# Altium PCB Smart Watch PCB Layout.PcbDoc
Units mm, origin at the board's own origin, x right, y up, seen from the top; angles counter-clockwise.
Board outline 30 x 25 mm, 4 copper layers (Top Layer, Signal Layer 1, Signal Layer 2, Bottom Layer), stack 0.778 mm thick; 25 components, 18 nets, 154 pads, 0 vias.
Unrouted connection lines stored in the file: 75.
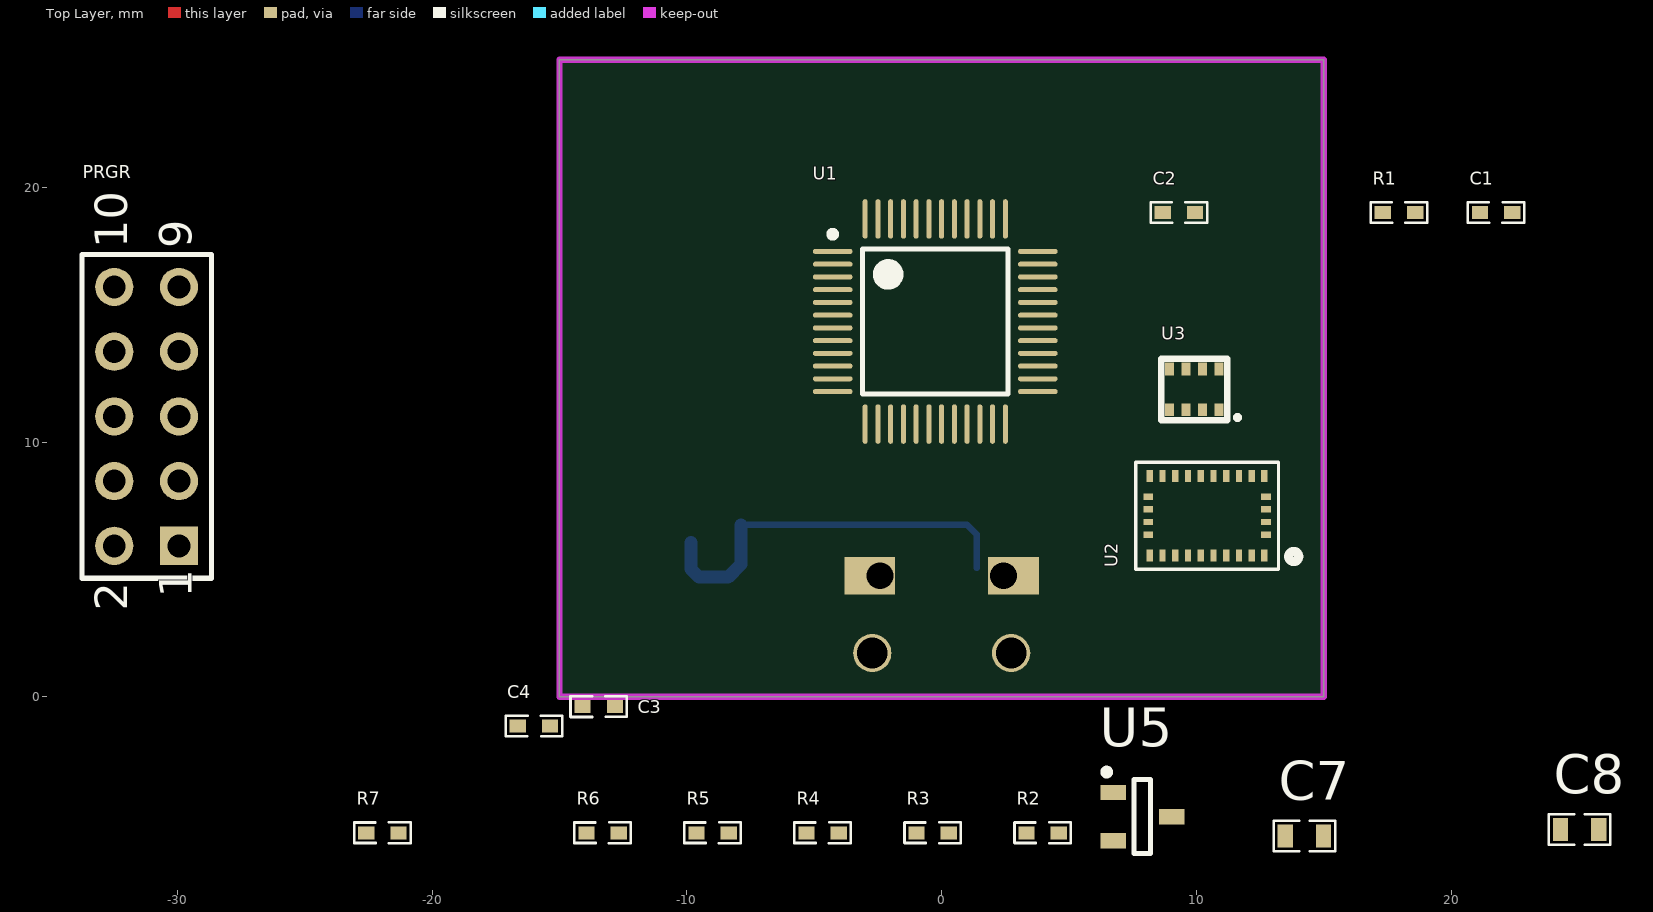
[diagram p0: Top Layer view]
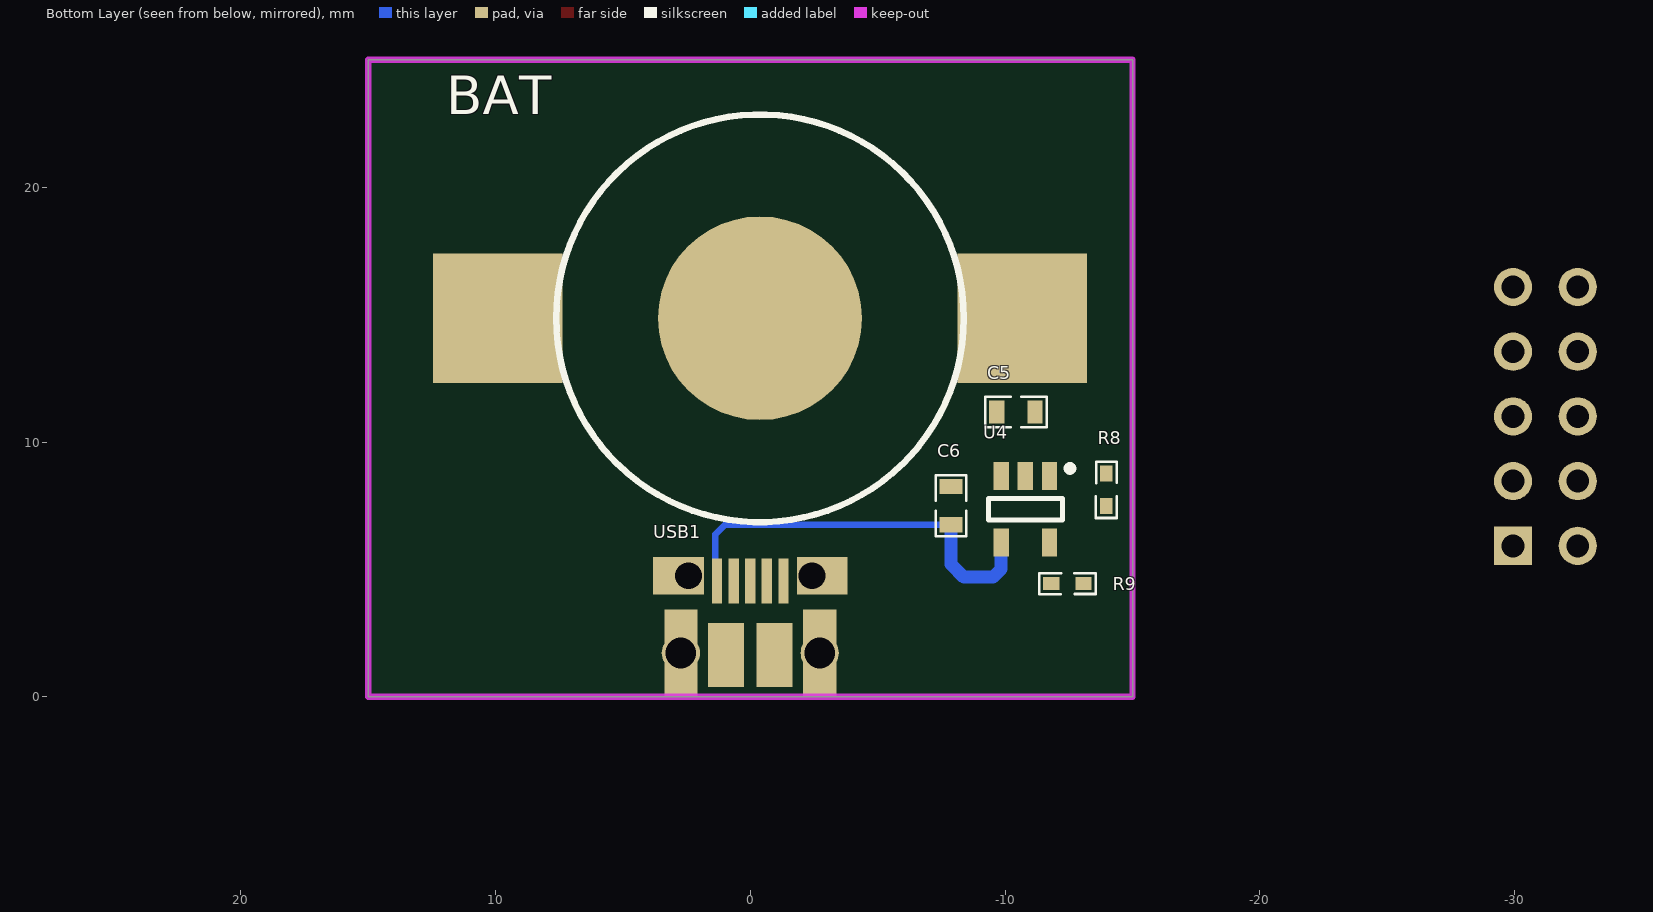
[diagram p1: Bottom Layer view, seen from below]

## Layer stack, top to bottom
Top Solder: solder mask 0.0102, Solder Resist, Dk 3.5
Top Layer: signal copper 0.0356
Dielectric 1: core 0.254, FR-4, Dk 4.2
Signal Layer 1: signal copper 0.036
Dielectric 3: prepreg 0.127, Dk 4.2
Signal Layer 2: signal copper 0.036
Dielectric 2: core 0.254, Dk 4.2
Bottom Layer: signal copper 0.0356
Bottom Solder: solder mask 0.0102, Solder Resist, Dk 3.5

## Board outline
-15,0 -15,25 15,25 15,0

## Design rules (kind name [scope] priority, off if disabled: settings)
Clearance [All] p1: gap=0.254
PolygonConnect [All] p1: connectstyle=Relief reliefconductorwidth=0.254 reliefentries=4 polygonreliefangle="90 Angle" airgapwidth=0.254
RoomDefinition "Smart Watch Schematic" [InComponentClass('Smart Watch Schematic')] p1: confinementstyle=ConfineIn formatcopy=TRUE lockcomponents=FALSE outline -33.998,-12.192 -26.416,-12.192 -26.416,-15.113 -33.998,-15.113
RoutingVias [All] p1: holewidth=0.711 width=1.27 viastyle="Through Hole" minholewidth=0.711 minwidth=1.27 maxholewidth=0.711 maxwidth=1.27
SolderMaskExpansion [All] p1: expansion=0.102
Width [All] p1: maxlimit=0.254 minlimit=0.254 preferedwidth=0.254
30 further rules are at their usual default settings.

## Components (designator, comment, footprint, x,y, rotation, side; value= is the part's Value field where it differs from the comment)
BAT "CR2032 3.7V LiPo" "Keystone 3002 CR2032 Battery Holder" -0.381,14.859 r0 bottom
C1 "0.1uF" _0402 21.12,19.009 r0 top
C2 "0.1uF" _0402 8.674,19.009 r0 top
C3 "0.1uF" _0402 -12.827,-0.381 r180 top
C4 "0.1uF" _0402 -15.367,-1.143 r180 top
C5 "0.1uF" _0603 -11.176,11.176 r0 bottom
C6 "0.1uF" _0603 -7.874,8.255 r270 bottom
C7 "1uF" _0603 13.486,-5.461 r0 top
C8 "1uF" _0603 24.281,-5.207 r0 top
PRGR "SAM SWD" HDR2X5 -29.934,5.928 r90 top
R1 "10K" _0402 17.31,19.009 r0 top
R2 "10K" _0402 3.326,-5.334 r0 top
R3 "10K" _0402 -0.992,-5.334 r0 top
R4 "10K" _0402 -5.31,-5.334 r0 top
R5 "10K" _0402 -9.628,-5.334 r0 top
R6 "10K" _0402 -13.946,-5.334 r0 top
R7 "1K" _0402 -22.582,-5.334 r0 top
R8 "10K" _0402 -13.97,8.763 r270 bottom
R9 "2K" _0402 -13.081,4.445 r0 bottom
U1 "ATSAML21G18B" _QFP48 -0.254,14.732 r0 top
U2 "BNO 055" BNO055 10.414,7.112 r180 top
U3 "BMP280" BMP280 9.906,12.065 r270 top
U4 "MCP73831" SOT23-5 -10.795,7.366 r270 bottom
U5 "APN7333" SOT23-3 7.874,-4.699 r0 top
USB1 "USB Micro B" "USB Micro B Connector" 0,0 r180 bottom

## Footprints (in the part's own frame and the unit in brackets; to place one, negate y for a bottom-side part, rotate by r counter-clockwise, add the part's x,y. Pads: shape width x height; smd on the part's side, far side on the other; paste and mask are expansions set on the pad)
_0402 [mil]
  rect 25x20 smd: 1(0,0) 2(50,0)
  silkscreen extent -18,-16 69,16
_0603 [mm]
  rect 0.6x0.9 smd: 1(0,0) 2(1.5,0)
  silkscreen extent -0.45,-0.6 1.95,0.6
_QFP48 [mm] "Thin QFP, 48-Leads, Body 7x7mm, Pitch 0.5mm, IPC High Density"
  oval 1.55x0.2 smd: 1(-4.025,2.75) 2(-4.025,2.25) 3(-4.025,1.75) 4(-4.025,1.25) 5(-4.025,0.75) 6(-4.025,0.25) 7(-4.025,-0.25) 8(-4.025,-0.75) 9(-4.025,-1.25) 10(-4.025,-1.75) 11(-4.025,-2.25) 12(-4.025,-2.75) 25(4.025,-2.75) 26(4.025,-2.25) 27(4.025,-1.75) 28(4.025,-1.25) 29(4.025,-0.75) 30(4.025,-0.25) 31(4.025,0.25) 32(4.025,0.75) 33(4.025,1.25) 34(4.025,1.75) 35(4.025,2.25) 36(4.025,2.75)
  oval 0.2x1.55 smd: 13(-2.75,-4.025) 14(-2.25,-4.025) 15(-1.75,-4.025) 16(-1.25,-4.025) 17(-0.75,-4.025) 18(-0.25,-4.025) 19(0.25,-4.025) 20(0.75,-4.025) 21(1.25,-4.025) 22(1.75,-4.025) 23(2.25,-4.025) 24(2.75,-4.025) 37(2.75,4.025) 38(2.25,4.025) 39(1.75,4.025) 40(1.25,4.025) 41(0.75,4.025) 42(0.25,4.025) 43(-0.25,4.025) 44(-0.75,4.025) 45(-1.25,4.025) 46(-1.75,4.025) 47(-2.25,4.025) 48(-2.75,4.025)
  silkscreen extent -4.15,-2.85 2.85,3.55, body extent -3.5,-3.5 3.5,3.5, height 1.6
BMP280 [mm]
  rect 0.5x0.35 smd: 1(0.8,0.975) 2(0.8,0.325) 3(0.8,-0.325) 4(0.8,-0.975) 5(-0.8,-0.975) 6(-0.8,-0.325) 7(-0.8,0.325) 8(-0.8,0.975)
  silkscreen extent -1.2,-1.3 1.2,1.75
BNO055 [mm] "BNO055"
  rect 0.25x0.475 smd: 1(-2.25,1.563) 6(-2.25,-1.563) 7(-1.75,-1.563) 8(-1.25,-1.563) 9(-0.75,-1.563) 10(-0.25,-1.563) 11(0.25,-1.563) 12(0.75,-1.563) 13(1.25,-1.563) 14(1.75,-1.563) 15(2.25,-1.563) 20(2.25,1.563) 21(1.75,1.563) 22(1.25,1.563) 23(0.75,1.563) 24(0.25,1.563) 25(-0.25,1.563) 26(-0.75,1.563) 27(-1.25,1.563) 28(-1.75,1.563)
  rect 0.375x0.25 smd: 2(-2.312,0.75) 3(-2.312,0.25) 4(-2.312,-0.25) 5(-2.312,-0.75) 16(2.312,-0.75) 17(2.312,-0.25) 18(2.312,0.25) 19(2.312,0.75)
  silkscreen extent -3.6,-2.1 2.8,2.1
HDR2X5 [mm] "Connector; Header; 5x2 Position"
  rect 1.5x1.5 hole 0.9: 1(0,0)
  round 1.5 hole 0.9: 2(0,2.54) 3(2.54,0) 4(2.54,2.54) 5(5.08,0) 6(5.08,2.54) 7(7.62,0) 8(7.62,2.54) 9(10.16,0) 10(10.16,2.54)
  silkscreen extent -1.27,-1.27 11.43,3.81
"Keystone 3002 CR2032 Battery Holder" [mm]
  rect 5.08x5.08 smd: 1(-10.285,0) 1(10.285,0)
  round 8 smd: 2(0,0)
  silkscreen extent -8,-8 8,8
SOT23-3 [mm]
  rect 1x0.6 smd: 1(-1.15,0.95) 2(-1.15,-0.95) 3(1.15,0)
  silkscreen extent -1.52,-1.45 0.33,1.87
SOT23-5 [mm]
  rect 1.1x0.6 smd: 1(-1.3,0.95) 2(-1.3,0) 3(-1.3,-0.95) 4(1.3,-0.95) 5(1.3,0.95)
  silkscreen extent -1.72,-1.45 0.43,1.87
"USB Micro B Connector" [mm]
  rect 0.4x1.75 smd: D+(0,4.548) D-(-0.65,4.548) GND(1.3,4.548) ID(0.65,4.548) VBUS(-1.3,4.548)
  rect 2x1.46 all layers, no hole: ""(-2.825,4.753) ""(2.825,4.753)
  round 1.5 hole 1.2: ""(-2.725,1.723) ""(2.725,1.723)
  rect 1.3x3.4 smd: ""(-2.725,1.723) ""(2.725,1.723)
  round 1.2 hole 1.05: ""(-2.425,4.753) ""(2.425,4.753)
  rect 1.425x2.5 smd: ""(-0.95,1.647) ""(0.95,1.647)

## Part data
BAT: library part "Keystone 3002 CR2032 Battery Holder"
C1 C2 C3 C4 C5 C6 C7 C8: library part Cap, "Capacitor"
PRGR: library part "Header 5X2", "Header, 5-Pin, Dual row"
R1 R2 R3 R4 R5 R6 R7 R8 R9: library part Res1, "Resistor"
U5: library part "AP7333 3.3V 300mA Regulator"
USB1: library part "USB Micro B Connector"

## Nets (pads, with @x,y where several pads share a name; then routed paths per layer and width w, separated by ;. In a path a pad name is that pad's centre, name@x,y a point inside that pad or via, vN(x,y) a via of type N, cw(c..) or ccw(c..) an arc to the next point about the centre after c; other vN are vias at no path point)
3.3V: C1.2 C3.2 C4.2 C8.2 PRGR.1 R3.2 R4.2 R5.1 R6.2 R7.2 U1.6 U1.17 U1.36 U1.43 U1.44 U2.3 U2.4 U2.28 U3.2 U3.5 U3.6 U3.8 U5.2
5V: C6.2 R8.2 U4.4 USB1.VBUS | length 15.6
  Bottom Layer w0.254: C6.2 0.992,6.755 1.366,6.381 USB1.VBUS@1.366,5.059
  Bottom Layer w0.508: U4.4 -9.845,5.019 -9.525,4.699 -8.382,4.699 -7.874,5.207 C6.2
"BNO055 INT": U2.14
GND: BAT.2 C1.1 C2.1 C3.1 C4.1 C5.1 C6.1 C7.1 C8.1 PRGR.3 PRGR.5 PRGR.9 R1.1 R2.1 R9.2 U1.5 U1.18 U1.35 U1.42 U2.2 U2.10 U2.15 U2.16 U2.18 U2.25 U3.1 U3.7 U4.2 U5.3 USB1.GND
NetC2_2: C2.2 U2.9
NetR1_2: R1.2 U2.5
NetR2_2: R2.2 U2.6
NetR6_1: R6.1 U2.17
NetR8_1: R8.1 U4.1
NetR9_1: R9.1 U4.5
RESET: PRGR.10 R5.2 U1.40 U2.11
SCL: R4.1 U1.22 U2.19 U3.4
SDA: R3.1 U1.21 U2.20 U3.3
SWCLK: PRGR.4 R7.1 U1.45
SWDIO: PRGR.2 U1.46
SWO: PRGR.6
VBAT: BAT.1 C5.2 C7.2 U4.3 U5.1
VDDCORE: U1.41
pads on no net: PRGR.7 PRGR.8 U1.1 U1.2 U1.3 U1.4 U1.7 U1.8 U1.9 U1.10 U1.11 U1.12 U1.13 U1.14 U1.15 U1.16 U1.19 U1.20 U1.23 U1.24 U1.25 U1.26 U1.27 U1.28 U1.29 U1.30 U1.31 U1.32 U1.33 U1.34 U1.37 U1.38 U1.39 U1.47 U1.48 U2.1 U2.7 U2.8 U2.12 U2.13 U2.21 U2.22 U2.23 U2.24 U2.26 U2.27 USB1. USB1.D+ USB1.D- USB1.ID

## Keep-outs
Keep-Out Layer:
  the board outline again, w0.254

## Text inside footprints (layer, text, board x,y; h text height)
PRGR: Top Overlay "10" at -31.966,17.612 h1.27 r90; Top Overlay "9" at -29.426,17.612 h1.27 r90; Top Overlay "1" at -29.426,3.896 h1.27 r90; Top Overlay "2" at -31.966,3.388 h1.27 r90